# Altium PCB car_pcb.PcbDoc
Units mm, origin at the board's own origin, x right, y up, seen from the top; angles counter-clockwise.
Board outline 64 x 85 mm, 4 copper layers (Top Side, Ground Plane, Power Plane, Bottom Side), stack 0.844 mm thick; 112 components, 79 nets, 337 pads, 3 vias.
Unrouted connection lines stored in the file: 239.
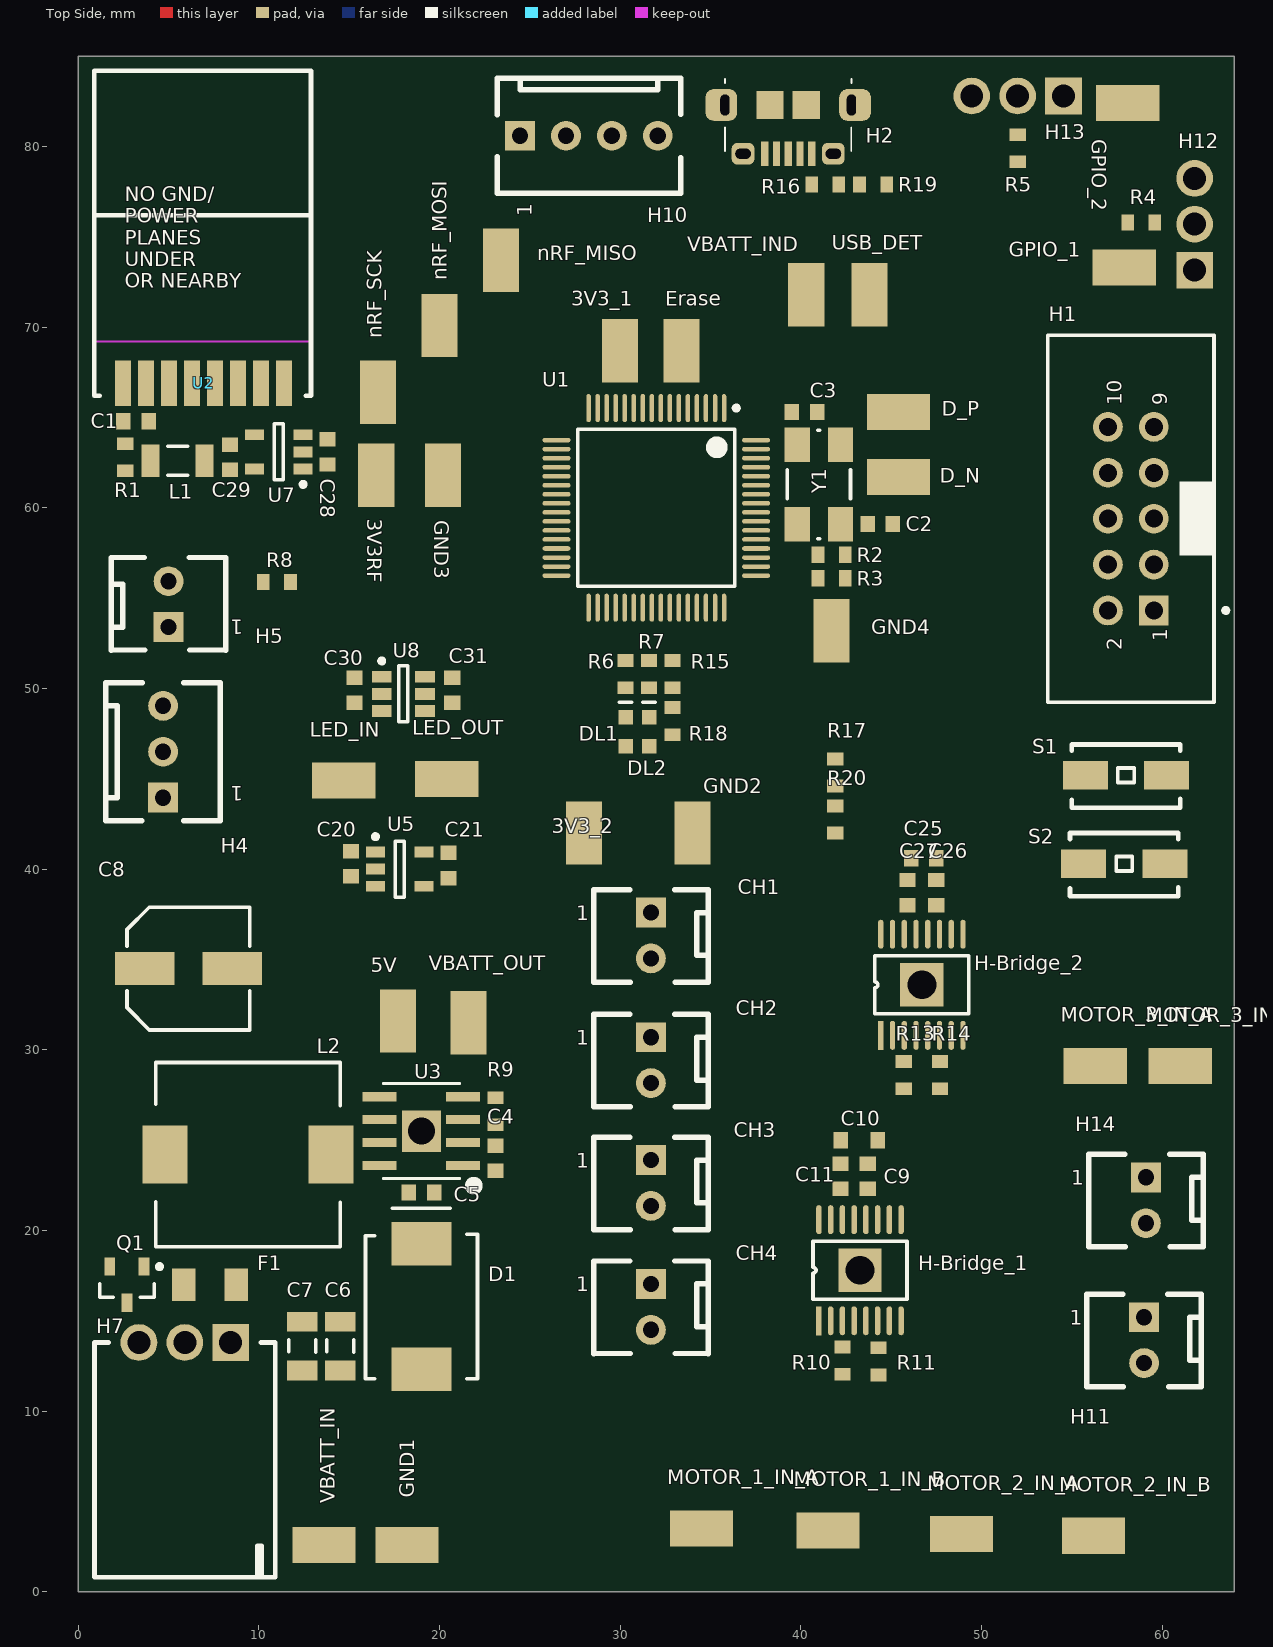
[diagram p0: Top Side view]
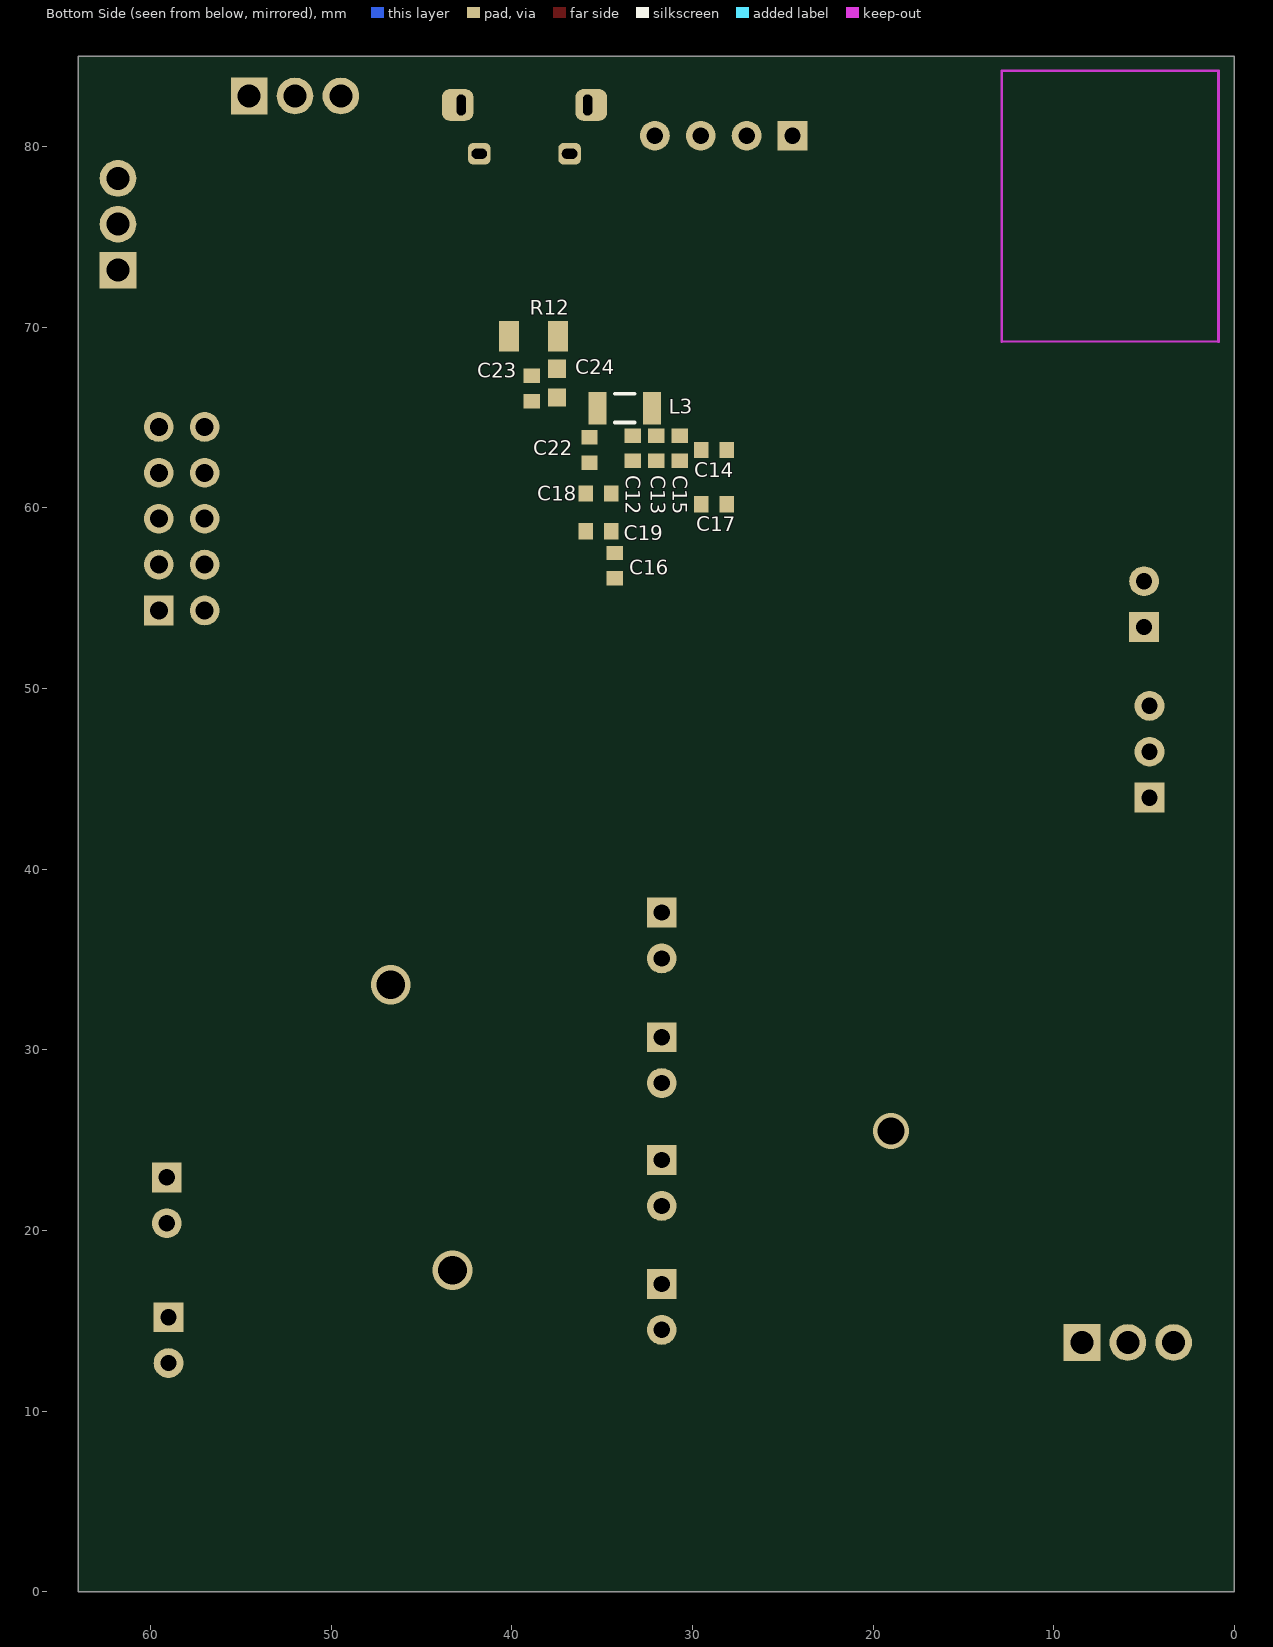
[diagram p1: Bottom Side view, seen from below]
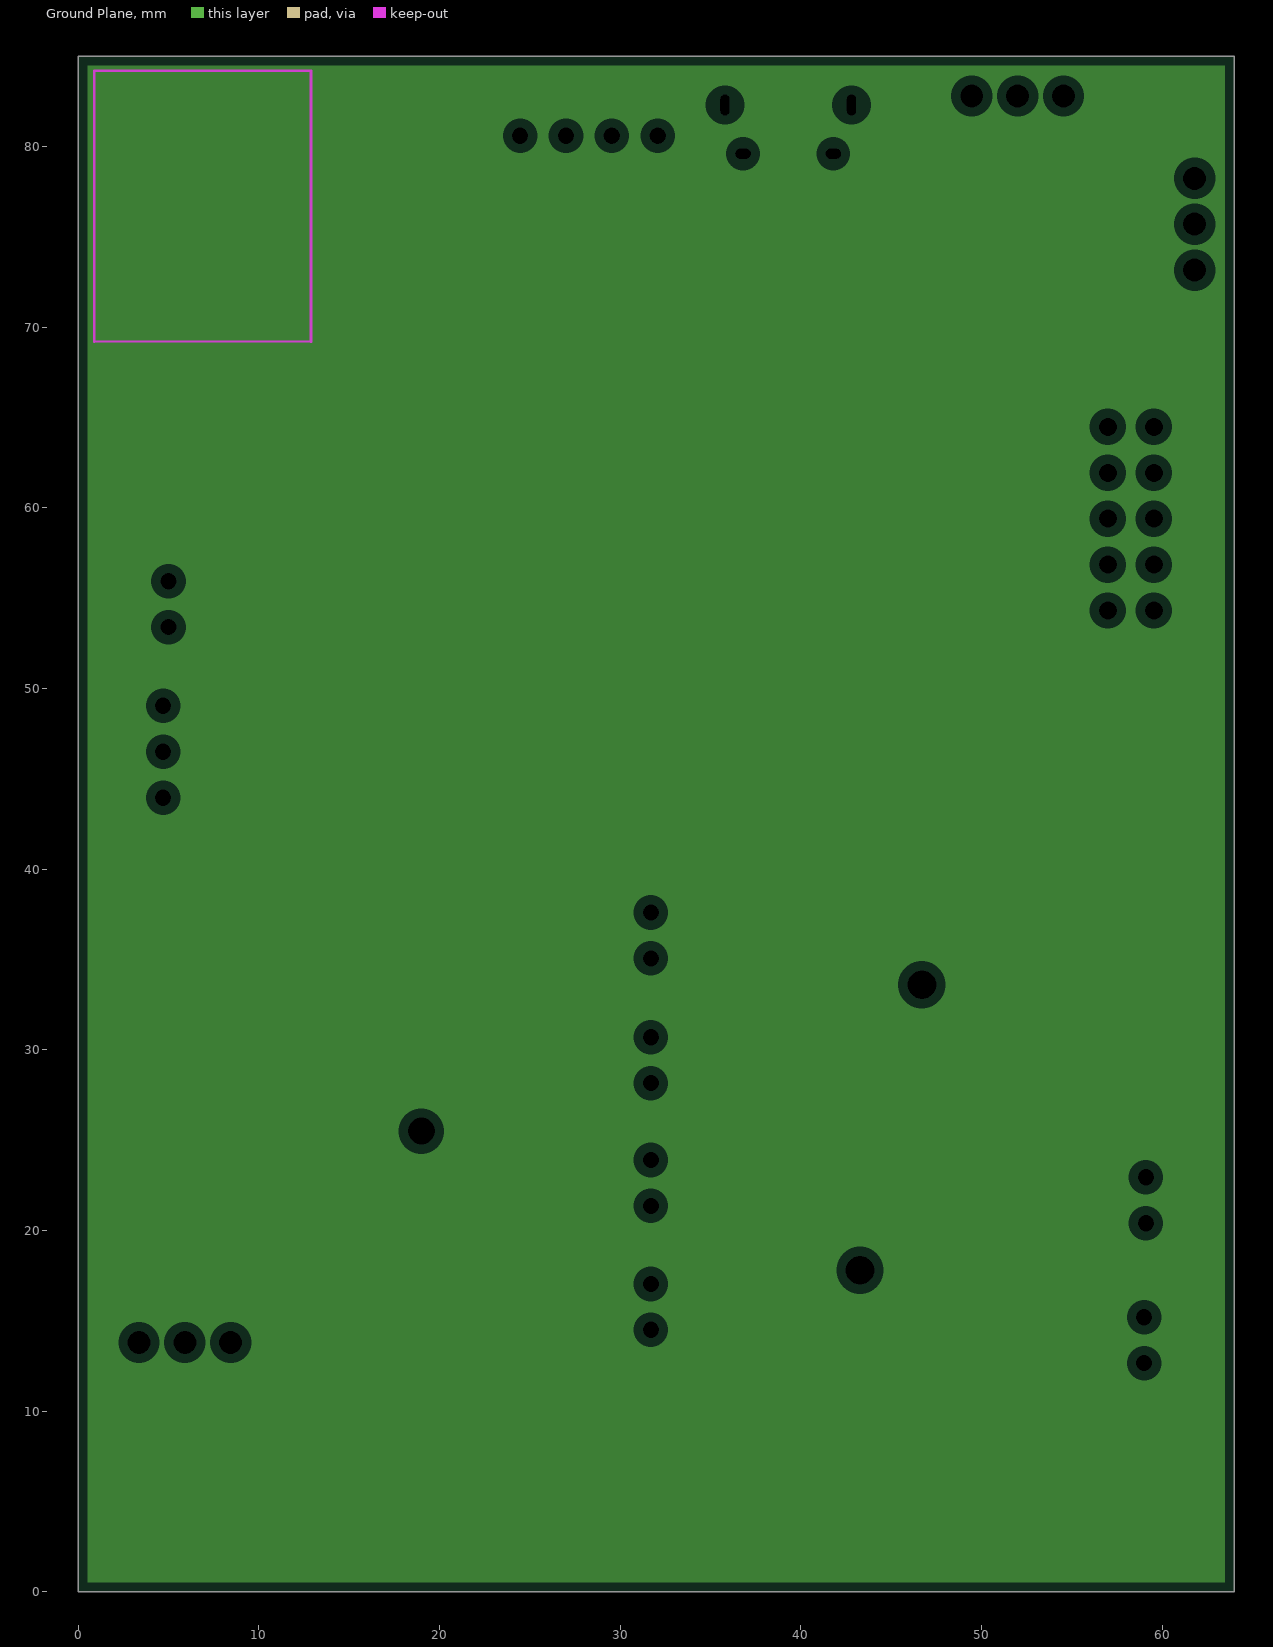
[diagram p2: Ground Plane, clearances drawn from the general rule]
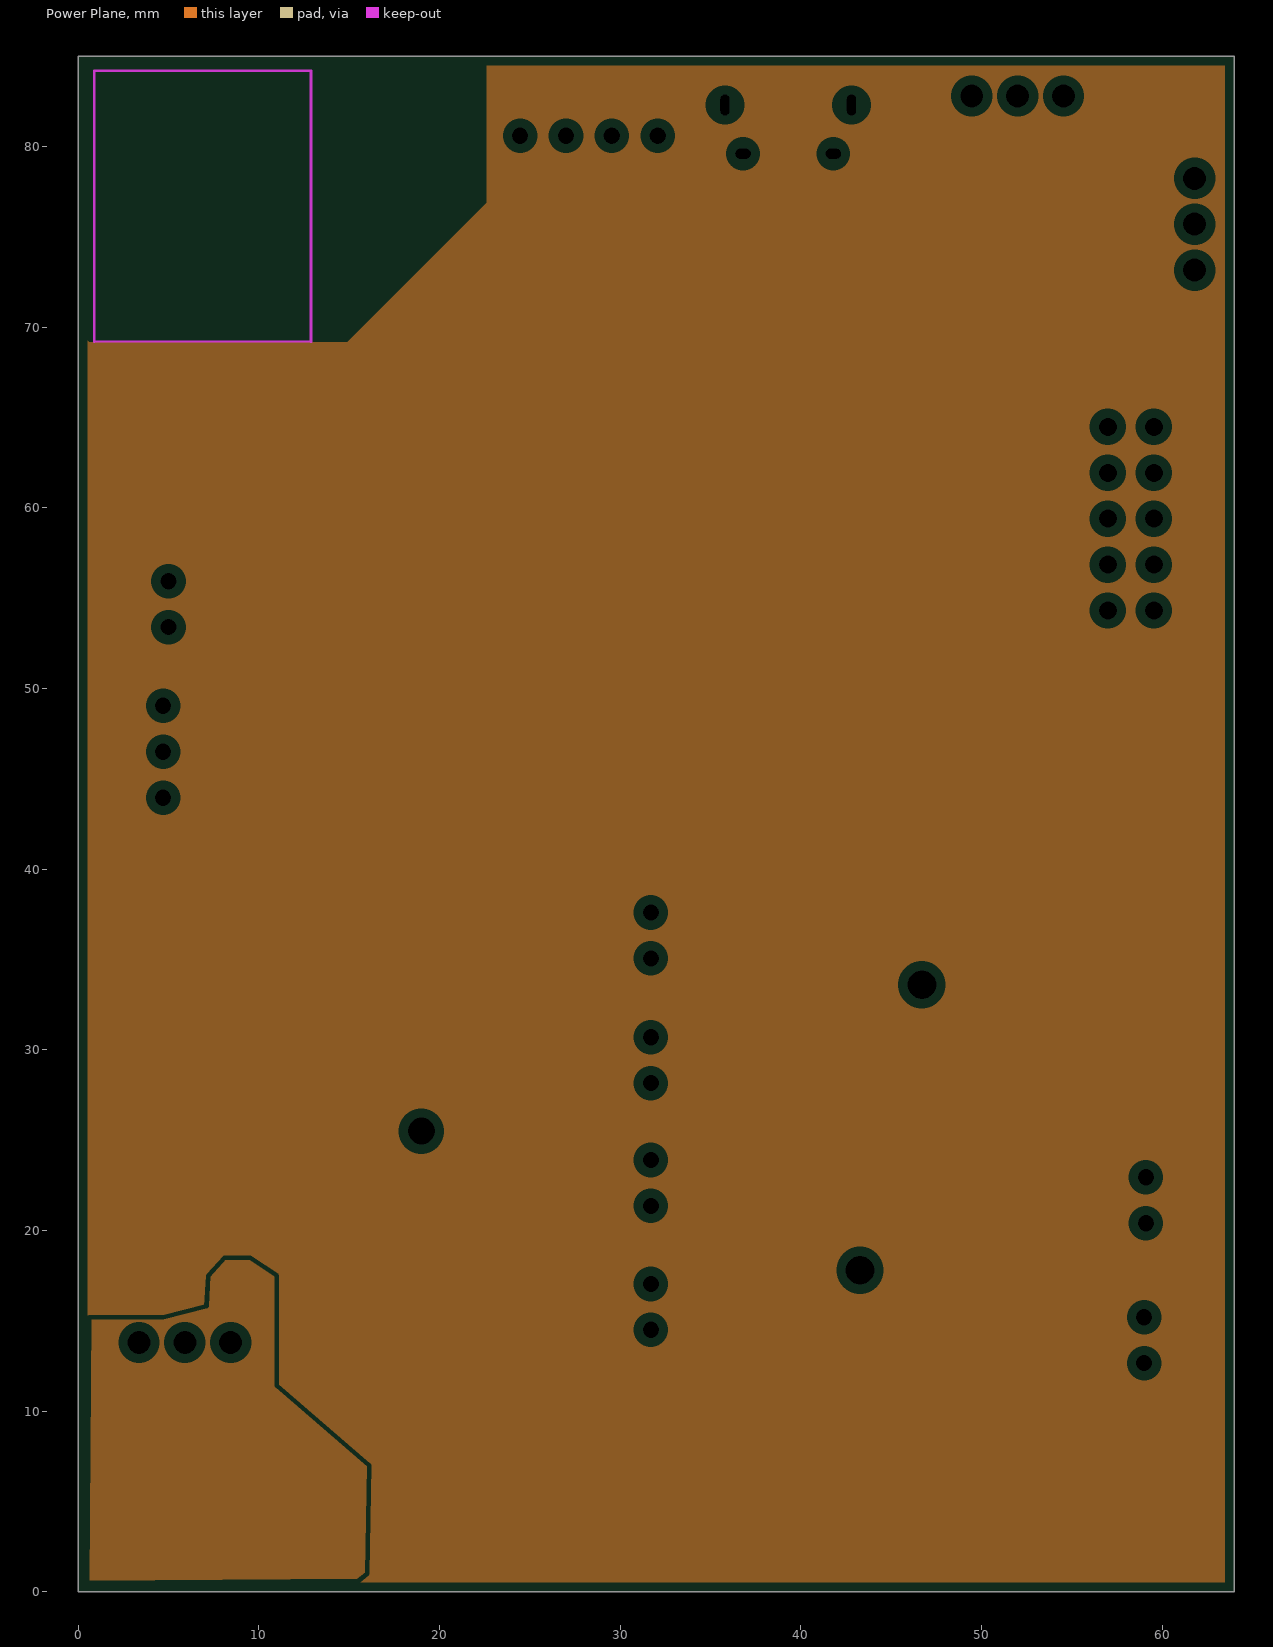
[diagram p3: Power Plane, clearances drawn from the general rule]

## Layer stack, top to bottom
Top Solder: solder mask 0.0102, Solder Resist, Dk 3.5
Top Side: signal copper 0.0356
Dielectric 1: core 0.32, FR-4, Dk 4.8
Ground Plane: plane copper 0.036
Dielectric 3: prepreg 0.127, Dk 4.2
Power Plane: plane copper 0.036
Dielectric 4: core 0.254, Dk 4.2
Bottom Side: signal copper 0.0356
Bottom Solder: solder mask 0.0102, Solder Resist, Dk 3.5

## Board outline
0,85 64,85 64,0 0,0 0,85

## Design rules (kind name [scope] priority, off if disabled: settings)
BoardOutlineClearance [All] p1: gap=0.5 ignorepadtopadclearanceinfootprint=FALSE
Clearance Min_Clearance_Circuit_Labs [All] p1: gap=0.15 ignorepadtopadclearanceinfootprint=FALSE except(0: Arc-Hole Track-Hole SMDPad-Hole THPad-Hole Via-Hole Fill-Hole Poly-Hole Region-Hole Text-Hole)
DiffPairsRouting [All] p1: maxlimit=0.254 minlimit=0.254 mostfreqgap=0.254 toplayer_minwidth=0.381 toplayer_maxwidth=0.381 toplayer_prefwidth=0.381 bottomlayer_minwidth=0.381 bottomlayer_maxwidth=0.381 bottomlayer_prefwidth=0.381 maxuncoupledlength=12.7
FanoutControl Fanout_BGA [IsBGA] p1 off: bgadir=Out bgaviamode=Centered fanoutstyle=Auto fanoutdirection=Alternating viagrid=0.025 // Fanout_BGA (Default Rule)
HoleSize [All] p1: absolutevalues=TRUE maxlimit=10 minlimit=0.3 maxpercent=80.000 minpercent=20.000
MinimumAnnularRing [All] p1: minimumring=0.1
MinimumSolderMaskSliver [All] p1: minsoldermaskwidth=0.1
NetAntennae [All] p1: netantennaetolerance=1
PasteMaskExpansion [All] p1 off: expansion=0.2
PlaneClearance [All] p1: clearance=0.508
PlaneConnect [All] p1: planeconnectstyle=Relief reliefexpansion=0.508 reliefentries=4 reliefconductorwidth=0.254 reliefairgap=0.254
PolygonConnect [All] p1: connectstyle=Relief reliefconductorwidth=0.254 reliefentries=4 polygonreliefangle="90 Angle" airgapwidth=0.254
RoutingVias [All] p1: holewidth=0.5 width=1 viastyle="Through Hole" minholewidth=0.3 minwidth=0.6 maxholewidth=1 maxwidth=2
SMDNeckDown [All] p1 off: percent=50.000
SMDToCorner [All] p1: distance=98425
SMDToPlane [All] p1: distance=1968504
SilkToSolderMaskClearance SilkscreenOverComponentPads [IsPad] p1: minsilkscreentomaskgap=0.254 clearancetoexposedcopper=TRUE
SolderMaskExpansion [All] p1: expansion=0.102
ViasUnderSMD [All] p1: allowed=FALSE
Width [All] p1: maxlimit=2 minlimit=0.15 preferedwidth=0.3
21 further rules are at their usual default settings.

## Classes and differential pairs
component class TestPoints: 3V3_2 3V3RF 5V D_N D_P GND1 GND2 GND3 GND4 GPIO_1 GPIO_2 LED_IN LED_OUT MOTOR_1_IN_A MOTOR_1_IN_B MOTOR_2_IN_A MOTOR_2_IN_B MOTOR_3_IN_A MOTOR_3_IN_B nRF_MISO nRF_MOSI nRF_SCK USB_DET VBATT_IN VBATT_IND VBATT_OUT
component class Power: "  " "         " C4 C5 C6 C7 C8 C9 C10 C11 C12 C13 C14 C15 C16 C17 C18 C19 C20 C21 C22 C23 C24 C25 C26 C27 C29 C30 C31 D1 F1 H-Bridge_1 H-Bridge_2 L2 L3 Q1 R9 R10 R11 R12 R13 R14 R15 R16 R17 R18 R19 R20 U3 U5 U7 U8
component class MCU: 3V3_1 C1 C2 C3 DL1 DL2 Erase H1 H2 L1 R1 R2 R3 R4 R5 R6 R7 S1 S2 U1 U2 Y1
component class Headers: Bumper CH1 CH2 CH3 CH4 H7 H12 H13 LED_TAPE M_1 M_2 R8 US
differential pair D: +D_P -D_N

## Components (designator, comment, footprint, x,y, rotation, side; value= is the part's Value field where it differs from the comment)
3V3_1 "TP" TP_1206 30,68.7 r90 top
3V3_2 "TP" TP_1206 28,42 r270 top
3V3RF "TP" TP_1206 16.5,61.8 r270 top
5V "TP" TP_1206 17.7,31.6 r270 top
C1 "10uF" CAPC1608L#1 3.2,64.8 r180 top
C2 "27nF" CAPC1608L#1 44.4,59.1 r180 top
C3 "27nF" CAPC1608L#1 40.2,65.3 r180 top
C4 "10uF" CAPC1608L#1 23.1,24 r90 top
C5 "100nF" CAPC1608L#1 19,22.1 r180 top
C6 "22uF" CAPC3216L 14.5,13.6 r90 top
C7 "22uF" CAPC3216L 12.4,13.6 r90 top
C8 "100µF/25V" CAPAE6666X77M 6.1,34.5 r0 top
C9 "10nF" CAPC1608L#1 43.7,23 r270 top
C10 "10uF" CAPC1608L#2 42.9,25 r0 top
C11 "2.2uF" CAPC1608L#1 42.2,23 r90 top
C12 "100nF" CAPC1608L#1 33.3,63.3 r90 bottom
C13 "100nF" CAPC1608L#1 32,63.3 r270 bottom
C14 "100nF" CAPC1608L#1 28.8,63.2 r180 bottom
C15 "100nF" CAPC1608L#1 30.7,63.3 r270 bottom
C16 "100nF" CAPC1608L#1 34.3,56.8 r270 bottom
C17 "100nF" CAPC1608L#1 28.8,60.2 r0 bottom
C18 "100nF" CAPC1608L#1 35.2,60.8 r0 bottom
C19 "100nF" CAPC1608L#1 35.2,58.7 r180 bottom
C20 "1uF" CAPC1608L#1 15.1,40.3 r270 top
C21 "1uF" CAPC1608L#1 20.5,40.2 r90 top
C22 "100nF" CAPC1608L#1 35.7,63.2 r90 bottom
C23 "4.7uF" CAPC1608N 37.5,66.9 r270 bottom
C24 "100nF" CAPC1608L#1 38.9,66.6 r270 bottom
C25 "10uF" CAPC1608L#1 46.8,40.6 r0 top
C26 "100nF" CAPC1608L#1 47.5,38.7 r90 top
C27 "2.2uF" CAPC1608L#1 45.9,38.7 r90 top
C28 "1uF" CAPC1608L#1 13.8,63.1 r90 top
C29 "1uF" CAPC1608L#1 8.4,62.8 r270 top
C30 "100nF" CAPC1608L#1 15.3,49.9 r90 top
C31 "100nF" CAPC1608L#1 20.7,49.9 r90 top
CH1 "2 Pin Molex KK HDR" MOLEX_KK_2_HDR 31.7,37.6 r270 top
CH2 "2 Pin Molex KK HDR" MOLEX_KK_2_HDR 31.7,30.7 r270 top
CH3 "2 Pin Molex KK HDR" MOLEX_KK_2_HDR 31.7,23.9 r270 top
CH4 "2 Pin Molex KK HDR" MOLEX_KK_2_HDR 31.7,17.04 r270 top
D1 "SCHOTTKY 30V 4A" SMC 19,15.8 r90 top
D_N "TP" TP_1206 45.4,61.7 r180 top
D_P "TP" TP_1206 45.4,65.3 r180 top
DL1 "Dark Green" WL-SMCW0603 30.3,48.4 r270 top
DL2 "Red" WL-SMCW0603 31.6,48.4 r270 top
Erase "TP" TP_1206 33.4,68.7 r270 top
F1 "5A" RESC3216N 7.3,17 r180 top
GND1 "TP" TP_1206 18.2,2.6 r180 top
GND2 "TP" TP_1206 34,42 r270 top
GND3 "TP" TP_1206 20.2,61.8 r270 top
GND4 "TP" TP_1206 41.7,53.2 r270 top
GPIO_1 "TP" TP_1206 57.9,73.3 r0 top
GPIO_2 "TP" TP_1206 58.1,82.4 r0 top
H1 "Header 5X2 Vert" IDC2.54-V10D 58.27,59.4 r90 top
H2 "JS_USB_MICRO_B" FCI_USB_10118194-0001LF 39.3,83.75 r180 top
H4 "3 Pin Molex KK Hdr" MOLEX_KK_3_HDR 4.7,43.96 r90 top
H5 "2 Pin Molex KK HDR" MOLEX_KK_2_HDR 5,53.4 r90 top
H7 "Battery_HEADER_3pin" BATT_HEADER_3POS 5.9,13.8 r180 top
H10 "Ultrasonic Sensor Connector" MOLEX_KK_4_HDR 24.46,80.6 r0 top
H11 "2 Pin Molex KK HDR" MOLEX_KK_2_HDR 59,15.2 r270 top
H12 "HEADER_3" HEADER_3POS 61.8,75.7 r90 top
H13 "HEADER_3" HEADER_3POS 52,82.8 r180 top
H14 "2 Pin Molex KK HDR" MOLEX_KK_2_HDR 59.1,22.94 r270 top
H-Bridge_1 "DRV8833" HTSOP16#1 41,15 r90 top locked (schematic designator U4)
H-Bridge_2 "DRV8833" HTSOP16#2 44.425,30.8 r90 top (schematic designator U6)
L1 "1A max, Idc 0.3R," INDC3216L 5.5,62.6 r0 top
L2 "IND 5.2UH 6A" INDUCTOR5u2 9.4,24.2 r180 top
L3 "1A max, Idc 0.3R," INDC3216L 33.75,65.525 r180 bottom
LED_IN "TP" TP_1206 14.7,44.9 r180 top
LED_OUT "TP" TP_1206 20.4,45 r180 top
MOTOR_1_IN_A "TP" TP_1206 34.5,3.5 r180 top
MOTOR_1_IN_B "TP" TP_1206 41.5,3.4 r180 top
MOTOR_2_IN_A "TP" TP_1206 48.9,3.2 r180 top
MOTOR_2_IN_B "TP" TP_1206 56.2,3.1 r180 top
MOTOR_3_IN_A "TP" TP_1206 56.3,29.1 r180 top
MOTOR_3_IN_B "TP" TP_1206 61,29.1 r180 top
nRF_MISO "TP" TP_1206 23.4,73.7 r270 top
nRF_MOSI "TP" TP_1206 20,70.1 r270 top
nRF_SCK "TP" TP_1206 16.6,66.4 r270 top
Q1 "SSM3J328R,LF" SOT23_L 2.7,17 r270 top
R1 "10R" RESC1608L 2.6,62.8 r270 top
R2 "27R" RESC1608L 41.7,57.4 r180 top
R3 "27R" RESC1608L 41.7,56.1 r180 top
R4 "100R" RESC1608L 58.85,75.8 r0 top
R5 "100R" RESC1608L 52,79.9 r90 top
R6 "100R" RESC1608L 30.3,50.8 r90 top
R7 "1K3" RESC1608L 31.6,50.8 r90 top
R8 "100K" RESC1608L 11,55.9 r180 top
R9 "100K" RESC1608L 23.1,26.6 r270 top
R10 "0R" RESC1608L 42.3,12.8 r270 top
R11 "0R" RESC1608L 44.3,12.75 r90 top
R12 "1R" RESC3216L 38.8,69.5 r0 bottom
R13 "0R" RESC1608L 45.7,28.6 r270 top
R14 "0R" RESC1608L 47.7,28.6 r270 top
R15 "470K" RESC1608L 32.9,50.8 r90 top
R16 "270K" RESC1608L 41.35,77.9 r180 top
R17 "10K" RESC1608L 41.9,45.35 r90 top
R18 "270K" RESC1608L 32.9,48.2 r90 top
R19 "470K" RESC1608L 44,77.9 r180 top
R20 "10K" RESC1608L 41.9,42.75 r90 top
S1 "EVQPNF05M" EVQPNF05M 58,45.2 r180 top
S2 "EVQPNF05M" EVQPNF05M 57.9,40.3 r180 top
U1 "ATSAM4S8BA-ANR" LQFP64_L 32,60 r270 top locked
U2 "nRF24 SMD" NRF24 0.886,66.2 r0 top
U3 "ADP2302ARDZ-5.0 BUCK" RD_8_1 19,25.5 r180 top locked value=Value
U5 "CAT6219-330TDGT3" SOT95P280X145-5N 17.8,40 r0 top
U7 "CAT6219-330TDGT3" SOT95P280X145-5N 11.1,63.1 r180 top
U8 "SN74LVC1T45" SOT23-6_N 18,49.7 r0 top
USB_DET "TP" TP_1206 43.8,71.8 r90 top
VBATT_IN "TP" TP_1206 13.6,2.6 r180 top
VBATT_IND "TP" TP_1206 40.3,71.8 r270 top
VBATT_OUT "TP" TP_1206 21.6,31.5 r90 top
Y1 "12MHz" 6.0X3.5-4 41,61.3 r270 top

## Footprints (in the part's own frame and the unit in brackets; to place one, negate y for a bottom-side part, rotate by r counter-clockwise, add the part's x,y. Pads: shape width x height; smd on the part's side, far side on the other; paste and mask are expansions set on the pad)
6.0X3.5-4 [mm] "4 SMD 6.0X3.5 mm No Lead Crystal"
  rect 1.9x1.4 smd: 1(-2.2,-1.2) 2(2.2,-1.2) 3(2.2,1.2) 4(-2.2,1.2)
  silkscreen extent -3,-1.75 3,1.75, body extent -3,-1.75 3,1.75, height 1.2
BATT_HEADER_3POS [mil]
  rect 80x80 hole 50: 1(-100,0)
  round 80 hole 50: 2(0,0) 3(100,0)
  silkscreen extent -197,0 197,512
CAPAE6666X77M [mm] "Aluminum Electrolytic Capacitor, Body 6.60x6.60x7.70mm, IPC Low Density"
  rect 3.3x1.85 smd: 1(2.425,0) 2(-2.425,0)
  silkscreen extent -3.4,-3.4 3.4,3.4, body extent -3.4,-3.4 3.4,3.4, height 7.7
CAPC1608L#1 [mm] "Chip Capacitor, Body 1.6x0.8mm, IPC High Density"
  rect 0.8x0.9 smd: 1(-0.7,0) 2(0.7,0)
  body extent -0.87,-0.48 0.87,0.48, height 0.85
CAPC1608L#2 [mm] "Chip Capacitor, Body 1.6x0.8mm, IPC High Density"
  rect 0.8x0.9 smd: 1(-0.7,0) 2(1.35,0)
  body extent -0.87,-0.48 0.87,0.48, height 0.85
CAPC1608N [mm] "Chip Capacitor, Body 1.6x0.8mm, IPC Medium Density"
  rect 1x1 smd: 1(-0.8,0) 2(0.8,0)
  body extent -0.87,-0.48 0.87,0.48, height 0.85
CAPC3216L [mm] "Chip Capacitor, Body 3.2x1.6mm, IPC High Density"
  rect 1.1x1.7 smd: 1(-1.35,0) 2(1.35,0)
  silkscreen extent -0.35,-0.75 0.35,0.75, body extent -1.7,-0.9 1.7,0.9, height 1.35
EVQPNF05M [mm] "Panansonic light touch SMD push button switch"
  rect 2.5x1.6 smd: 1(-2.25,0) 2(2.25,0)
  silkscreen extent -3,-1.7 3,1.8, body extent -3,-1.7 3,1.8, height 5
FCI_USB_10118194-0001LF [mm] "Micro USB B Type Receptacle"
  rect 0.4x1.35 smd mask+0.07: 1(-1.3,4.15) 2(-0.65,4.15) 3(0,4.15) 4(0.65,4.15) 5(1.3,4.15)
  rrect50% 1.75x1.75 hole 0.5 slot 1.15 at 90 deg copper offset -0.2,0 paste+0 mask+0.1: 6(-3.5,1.45)
  rrect50% 1.25x1.2 hole 0.55 slot 0.85 at 0 deg: 6(-2.5,4.15) 6(2.5,4.15)
  rect 1.5x1.55 smd: 6(-1,1.45) 6(1,1.45)
  rrect50% 1.75x1.75 hole 0.5 slot 1.15 at 90 deg copper offset 0.2,0 paste+0 mask+0.1: 6(3.5,1.45)
  silkscreen extent -3.5,0 3.5,4
HEADER_3POS [mil]
  rect 80x80 hole 50: 1(-100,0)
  round 80 hole 50: 2(0,0) 3(100,0)
HTSOP16#1 [mm]
  rect 1.6x0.3 smd: 1(0,0)
  oval 1.6x0.3 smd: 2(0,-0.65) 3(0,-1.3) 4(0,-1.95) 5(0,-2.6) 6(0,-3.25) 7(0,-3.9) 8(0,-4.55) 9(5.6,-4.55) 10(5.6,-3.9) 11(5.6,-3.25) 12(5.6,-2.6) 13(5.6,-1.95) 14(5.6,-1.3) 15(5.6,-0.65) 16(5.6,0)
  rect 2.4x2.4 smd paste-0.5: 17(2.8,-2.275)
  silkscreen extent 1.2,-4.88 4.4,0.33
HTSOP16#2 [mm]
  rect 1.6x0.3 smd: 1(0,0)
  oval 1.6x0.3 smd: 2(0,-0.65) 3(0,-1.3) 4(0,-1.95) 5(0,-2.6) 6(0,-3.25) 7(0,-3.9) 8(0,-4.55) 9(5.6,-4.55) 10(5.6,-3.9) 11(5.6,-3.25) 12(5.6,-2.6) 13(5.6,-1.95) 14(5.6,-1.3) 15(5.6,-0.65) 16(5.6,0)
  rect 2.4x2.4 smd: 17(2.8,-2.275)
  silkscreen extent 1.2,-4.88 4.4,0.33
IDC2.54-V10D [mm] "Connector; IDC, Low Profile Male Header, Thru-Hole; 10 Position; Vertical; Pitch 2.54 mm; Body 20.32 x 9.2 x 9.45 mm (LxWxH)"
  rect 1.65x1.65 hole 1: 1(-5.08,-1.27)
  round 1.65 hole 1: 2(-5.08,1.27) 3(-2.54,-1.27) 4(-2.54,1.27) 5(0,-1.27) 6(0,1.27) 7(2.54,-1.27) 8(2.54,1.27) 9(5.08,-1.27) 10(5.08,1.27)
  silkscreen extent -10.16,-5.38 10.16,4.6, body extent -10.16,-4.6 10.16,4.6, height 9.45
INDC3216L [mm] "Chip Inductor, Body 3.2x1.6mm, IPC High Density"
  rect 1x1.8 smd: 1(-1.5,0) 2(1.5,0)
  silkscreen extent -0.55,-0.8 0.55,0.8, body extent -1.75,-0.95 1.75,0.95, height 1.9
INDUCTOR5u2 [mm]
  rect 2.5x3.2 smd: 1(-4.6,0) 2(4.6,0)
  silkscreen extent -5.1,-5.1 5.1,5.1
LQFP64_L [mm] "Thin QFP, 64-Leads, Body 10x10mm, Pitch 0.5mm, IPC High Density"
  oval 1.55x0.25 smd mask+0.07: 1(-5.525,3.75) 2(-5.525,3.25) 3(-5.525,2.75) 4(-5.525,2.25) 5(-5.525,1.75) 6(-5.525,1.25) 7(-5.525,0.75) 8(-5.525,0.25) 9(-5.525,-0.25) 10(-5.525,-0.75) 11(-5.525,-1.25) 12(-5.525,-1.75) 13(-5.525,-2.25) 14(-5.525,-2.75) 15(-5.525,-3.25) 16(-5.525,-3.75) 33(5.525,-3.75) 34(5.525,-3.25) 35(5.525,-2.75) 36(5.525,-2.25) 37(5.525,-1.75) 38(5.525,-1.25) 39(5.525,-0.75) 40(5.525,-0.25) 41(5.525,0.25) 42(5.525,0.75) 43(5.525,1.25) 44(5.525,1.75) 45(5.525,2.25) 46(5.525,2.75) 47(5.525,3.25) 48(5.525,3.75)
  oval 0.25x1.55 smd mask+0.07: 17(-3.75,-5.525) 18(-3.25,-5.525) 19(-2.75,-5.525) 20(-2.25,-5.525) 21(-1.75,-5.525) 22(-1.25,-5.525) 23(-0.75,-5.525) 24(-0.25,-5.525) 25(0.25,-5.525) 26(0.75,-5.525) 27(1.25,-5.525) 28(1.75,-5.525) 29(2.25,-5.525) 30(2.75,-5.525) 31(3.25,-5.525) 32(3.75,-5.525) 49(3.75,5.525) 50(3.25,5.525) 51(2.75,5.525) 52(2.25,5.525) 53(1.75,5.525) 54(1.25,5.525) 55(0.75,5.525) 56(0.25,5.525) 57(-0.25,5.525) 58(-0.75,5.525) 59(-1.25,5.525) 60(-1.75,5.525) 61(-2.25,5.525) 62(-2.75,5.525) 63(-3.25,5.525) 64(-3.75,5.525)
  silkscreen extent -5.65,-4.35 4.35,4.55, body extent -5,-5 5,5, height 1.6
MOLEX_KK_2_HDR [mil] "MOLEX_KK_2_HDR"
  rect 65x65 hole 35.43: 1(0,0)
  round 65 hole 35.43: 2(100,0)
  silkscreen extent -50,-125 152,125, body extent -44,-121 146,119, height 630
MOLEX_KK_3_HDR [mil] "MOLEX_KK_3_HDR"
  rect 65x65 hole 35.43: 1(0,0)
  round 65 hole 35.43: 2(100,0) 3(200,0)
  silkscreen extent -50,-125 250,125, body extent -44,-120 244,119, height 630
MOLEX_KK_4_HDR [mil] "MOLEX_KK_4_HDR"
  rect 65x65 hole 35.43: 1(0,0)
  round 65 hole 35.43: 2(100,0) 3(200,0) 4(300,0)
  silkscreen extent -50,-125 350,125, body extent -44,-119 343,119, height 630
NRF24 [mm]
  rect 0.9x2.5 smd: 1(1.6,0.7) 2(2.871,0.7) 3(4.143,0.7) 4(5.414,0.7) 5(6.686,0.7) 6(7.957,0.7) 7(9.229,0.7) 8(10.5,0.7)
  Keep-Out Layer lines w0.1: 0,3 12,3
  Keep-Out Layer lines w0.15: 0,3 0,18 12,18 12,3
  silkscreen extent 0,0 12,18
RD_8_1 [mil]
  rect 74x20 smd paste+0 mask+0: 1(-91,75) 2(-91,25) 3(-91,-25) 4(-91,-75) 5(91,-75) 6(91,-25) 7(91,25) 8(91,75)
  rect 84.65x90 smd paste-44.5 mask+0: EPAD(0,0)
  silkscreen extent -118,-104 84,123, body extent 0,0 10,10, height 10
RESC1608L [mm] "Chip Resistor, Body 1.6x0.8mm, IPC High Density"
  rect 0.7x0.9 smd: 1(-0.75,0) 2(0.75,0)
  body extent -0.85,-0.48 0.85,0.48, height 0.9
RESC3216L [mm] "Chip Resistor, Body 3.1x1.6mm, IPC High Density"
  rect 1.1x1.7 smd: 1(-1.35,0) 2(1.35,0)
  body extent -1.68,-0.87 1.68,0.87, height 2.54
RESC3216N [mm] "Chip Resistor, Body 3.2x1.6mm, IPC Medium Density"
  rect 1.3x1.8 smd: 1(-1.45,0) 2(1.45,0)
  body extent -1.68,-0.87 1.68,0.87, height 0.71
SMC [mm] "DO-214-AB/SMC; 2 C-Bend Leads; Body 7.9 x 5.9 mm, inc. leads (LxW)"
  rect 2.4x3.3 smd: 1(-3.475,0) 2(3.475,0)
  silkscreen extent -4,-3.1 5.43,3.1
SOT23-6_N [mm]
  rect 1.1x0.65 smd: 1(-1.2,0.95) 2(-1.2,0) 3(-1.2,-0.95) 4(1.2,-0.95) 5(1.2,0) 6(1.2,0.95)
  silkscreen extent -1.32,-1.55 0.25,1.95, body extent -0.9,-1.55 0.9,1.55, height 1.45
SOT23_L [mm] "SOT23, 3-Leads, Body 2.9x1.3mm, Pitch 0.95mm, Lead Span 2.3mm, IPC High Density"
  rect 1x0.6 smd: 1(-1,0.95) 2(-1,-0.95) 3(1,0)
  silkscreen extent -1.12,-1.5 0.7,1.93, body extent -0.7,-1.5 0.7,1.5, height 1.1
SOT95P280X145-5N [mm] "SOT23, 5-Leads, Body 2.90x2.80mm, Pitch 0.95mm, IPC Medium Density"
  rect 1.05x0.6 smd: 1(-1.35,0.95) 2(-1.35,0) 3(-1.35,-0.95) 4(1.35,-0.95) 5(1.35,0.95)
  silkscreen extent -1.47,-1.55 0.25,1.92, body extent -0.87,-1.52 0.87,1.53, height 1.45
TP_1206 [mm] "Test Point Pad"
  rect 3.5x2 smd: 1(0,0)
  body extent -1.62,-0.85 1.63,0.8, height 2
WL-SMCW0603 [mm] "2.4 x 0.8 x 0.7mm LED"
  rect 0.8x0.8 smd: 1(0,0) 2(1.6,0)
  silkscreen extent -0.85,-0.35 -0.85,0.35

## Part data
3V3_1 3V3_2 3V3RF 5V D_N D_P Erase GND1 GND2 GND3 GND4 GPIO_1 GPIO_2 LED_IN LED_OUT MOTOR_1_IN_A MOTOR_1_IN_B MOTOR_2_IN_A MOTOR_2_IN_B MOTOR_3_IN_A MOTOR_3_IN_B nRF_MISO nRF_MOSI nRF_SCK USB_DET VBATT_IN VBATT_IND VBATT_OUT: library part TP_1206, "Test-Point 3.3x1.6x2.1mm SMD", Manufacturer="Harwin Inc", Manufacturer Part Number=S1751-46R, Supplier Part Number 1=952-1478-2-ND, Mounting Type="Surface Mount", Storage Location=ProtoPlace, Supplier="ECE Dept", Supplier 1=Digi-Key, Supplier 2=Farnell, Supplier Part Number 2=1826282, Type="PC Test Point"
C1 C4 C10 C25: library part CC_10uF_0603, "CAP CER 10UF X5R +-20% 6V3 0603", Voltage - Rated=6.3V, Storage Location="PCB Assembly WS", Supplier="ECE Dept"
C2 C3: library part CC_27nF_0603, "CAP CER 27nF X7R +-10% 50V 0603", Code_IPC="1608 [0603]", PackageReference=0603, Storage Location="PCB Assembly WS", Supplier="ECE Dept"
C5 C12 C13 C14 C15 C16 C17 C18 C19 C22 C24 C26 C30 C31: library part CC_100nF_0603, "CAP CER 100nF X7R +-10% 50V 0603", Code_IPC="1608 [0603]", PackageReference=0603, Storage Location="PCB Assembly WS", Supplier="ECE Dept"
C6 C7: library part CC_22uF_1206, "CAP CER 22uF Y5V -20% +80% 10V 1206", Dielectric=Y5V, Max Voltage=10V, Storage Location="PCB Assembly WS", Supplier="ECE Dept"
C8: library part CA_100uF_25V, "CAP ALUM 100UF 25V 20% SMD", Manufacturer=Nichicon, Manufacturer Part Number=UWT1E101MCL1GS, Operating Temperature="-55°C ~ 105°C", Package / Case="Radial, Can - SMD", Ripple Current=91mA, Supplier Part Number 1=493-2190-1-ND, Capacitance=100µF/25V, Height - Seated (Max)="0.303\" (7.70mm)", Mounting Type="Surface Mount", Size / Dimension="0.248\" Dia (6.30mm)", Supplier 1=Digi-Key
C9: library part CC_10nF_0603, "CAP CER 10nF X7R +-10% 50V 0603", Code_IPC="1608 [0603]", PackageReference=0603, Storage Location="PCB Assembly WS", Supplier="ECE Dept"
C11 C27: library part CC_2.2uF_0603, "CAP CER 2.2uF X5R +-20% 10V 0603", Max Voltage=10V, Code_IPC="1608 [0603]", PackageReference=0603, Storage Location="PCB Assembly WS", Supplier="ECE Dept"
C20 C21 C28 C29: library part CC_1uF_0603, "CAP CER 1uF Y5V -20% +80% 16V 0603", Max Voltage=16V, Code_IPC="1608 [0603]", PackageReference=0603, Storage Location="PCB Assembly WS", Supplier="ECE Dept"
C23: library part CC_4.7uF_0603, "CAP CER 4.7uF X5R +-20%  10V 0603", Max Voltage=10V, Code_IPC=2012[0805], Note="Footprint corresponds to dimensions for bulk cassette packaging. This case size has tightened tolerances.", PackageReference=0805, Storage Location="PCB Assembly WS", Supplier="ECE Dept"
CH1 CH2 CH3 CH4 H5 H11 H14: library part JA_MOLEX_KK_2POS, "CONN HEADER 2POS 2.54mm VERT_Thru Hole", Supplier Part Number 1=1462926, Storage Location="ECE Dept Store", Supplier="ECE Dept", Supplier 1=Farnell
D1: library part MBRS330T3G, "DIODE SCHOTTKY 30V 4A SMC", Base Part Number=MBRS330, Capacitance @ Vr, F=-, Current - Average Rectified (Io)=4A, Manufacturer="ON Semiconductor", Operating Temperature - Junction="-65°C ~ 150°C", Package / Case="DO-214AB, SMC", Supplier Device Package=SMC, Supplier Part Number 1=MBRS330T3GOSCT-ND, Category="Discrete Semiconductor Products", ComponentLink1Description=http://www.onsemi.com/pub/Collateral/MBRS340T3-D.PDF, ComponentLink1URL=http://www.onsemi.com/pub/Collateral/MBRS340T3-D.PDF, Diode Type=Schottky, Manufacturer Part Number=MBRS330T3G, Mounting Type="Surface Mount", Packaging="Cut Tape (CT)", Part Status=Active, Pricing 1="1=0.93, 10=0.79, 100=0.5902, 500=0.46368, 1000=0.35829 (NZD)", RoHS="RoHS Compliant", Speed="Fast Recovery =< 500ns, > 200mA (Io)", Stock 1=8919, Supplier 1=Digi-Key
DL1: library part DL_150060GS75000, "LED Dk Green 430mcd 0603 SMD", Forward Current If=30, Forward Voltage=3.2, Manufacturer="WURTH ELEKTRONIK", Manufacturer Part Number=150060GS75000, Supplier Part Number 1=2322070, LED Colour="Dark Green", LED Mounting=SMD, Lens Shape=Rectangular, Luminous Intensity=430, Storage Location="PCB Assembly WS", Supplier="ECE Dept", Supplier 1=Farnell, Viewing Angle=140°, Wavelength Typ=520
DL2: library part DL_150060RS75000, "LED Red 250mcd 0603 SMD", Forward Current If=30, Forward Voltage=2, Manufacturer="WURTH ELEKTRONIK", Manufacturer Part Number=150060RS75000, Supplier Part Number 1=2322071, LED Colour=Red, LED Mounting=SMD, Lens Shape=Rectangular, Luminous Intensity=250, Storage Location="PCB Assembly WS", Supplier="ECE Dept", Supplier 1=Farnell, Viewing Angle=140°, Wavelength Typ=625
F1: library part FS_Fuse_5.0A, "Fuse 5.0A Fast Acting 1206 SMD", Case/Package=1206, Case Code (Metric)=3216, DC Cold Resistance=19mR, Manufacturer="Bel TRP", Manufacturer Part Number=C1F5, Max Operating Temperature=125°C, Min Operating Temperature=-55°C, Supplier Part Number 1=507-1886-1-ND, Voltage Rating=125V, Voltage Rating (DC)=63V, Approvals=CE,cURus, Case Code (Imperial)=1206, ComponentLink1Description=http://www.farnell.com/datasheets/2571625.pdf, ComponentLink1URL=http://www.farnell.com/datasheets/2571625.pdf, ComponentLink2Description=http://belfuse.com/pdfs/C1F.pdf, ComponentLink2URL=http://belfuse.com/pdfs/C1F.pdf, ComponentLink3Description=http://www.mouser.com/ds/2/643/C1F-594910.pdf, ComponentLink3URL=http://www.mouser.com/ds/2/643/C1F-594910.pdf, ComponentLink4Description=https://belfuse.com/resources/StewartConnector/C1F.pdf, ComponentLink4URL=https://belfuse.com/resources/StewartConnector/C1F.pdf, Contact Plating=Nickel,Tin, Current Rating=5A, Fuse Type="Board Mount (Cartridge Style Excluded)", Length=0.126inch, Mount="Surface Mount", Number of Pins=2, Packaging="Tape and Reel", Pricing 1="1=0.32, 5=0.312, 10=0.298, 50=0.2662, 100=0.2479, 250=0.22032, 500=0.1836, 1000=0.17442 (USD)", Stock 1=725, Supplier 1=Digi-Key, Supplier 2=Element14, Supplier Part Number 2=2848595, Voltage Rating (AC)=125V, Width=0.062inch
H1: library part JA_HDR_IDC_5X2_VERT, "IDC Header, 2,54mm, 10-Pin, Vert", Supplier Part Number 1=1096985, Storage Location="ECE Dept Store", Supplier="ECE Dept", Supplier 1=Farnell
H2: library part JS_USB_MICRO_B_SMT, "CONN USB MICRO B RECPT SMT R/A", Manufacturer=FCI, Manufacturer Part Number=10118194-0001LF, Supplier Part Number 1=609-4618-1-ND, Features="Shielded, Solder Retention", Gender=Receptacle, Mounting Type="Surface Mount, Right Angle, Horizontal", Number of Contacts=5, Specifications="USB 2.0", Supplier 1=Digi-Key
H4: library part JA_MOLEX_KK_3POS, "CONN HEADER 3POS 2.54mm VERT_Thru Hole", Manufacturer=Molex, Manufacturer PN=22-23-2031, Supplier Part Number 1=9731156, Storage Location="ECE Dept Store", Supplier="ECE Dept", Supplier 1=Farnell
H7 H12 H13: "3Pin Header 2.54mm spacing"
H10: library part JA_MOLEX_KK_4POS, "CONN HEADER 4POS 2.54mm VERT_Thru Hole", Manufacturer=Molex, Manufacturer PN=22-23-2041, Supplier Part Number 1=9731164, Storage Location="ECE Dept Store", Supplier="ECE Dept", Supplier 1=Farnell
H-Bridge_1 H-Bridge_2: "Dual H-Bridge Motor Driver 1.5A"
L1 L3: library part IN_Ferrite-Bead, "Ferrite Bead, Rdc 0.3R, Z100MHZ 600R, Imax 1A, SMD 1206", DC Current Rating=1, DC Resistance Max=0.08, Ferrite Case Style="1206 ^3216 Metric]", Frequency Range="50MHz to 1", Impedance Tolerance="± 25%", Manufacturer=FAIR-RITE, Manufacturer Part Number=2512066017Y1, Supplier Part Number 1=1612060, Ferrite Mounting=SMD, Impedance=600, Manufacturer PN=2512066017Y1, Storage Location="PCB Assembly WS", Supplier="ECE Dept", Supplier 1=Farnell
L2: library part CDRH104RNP-5R2NC, "FIXED IND 5.2UH 6A 22 MOHM SMD", Current - Saturation=5.6A, DC Resistance (DCR)="22 mOhm Max", Frequency - Self Resonant=-, Manufacturer="Sumida America Components Inc.", Operating Temperature="-40°C ~ 100°C", Package / Case=Nonstandard, Supplier Part Number 1=308-2280-1-ND, Tolerance=±30%, Category="Inductors, Coils, Chokes", ComponentLink1Description=http://products.sumida.com/products/pdf/CDRH104R.pdf, ComponentLink1URL=http://products.sumida.com/products/pdf/CDRH104R.pdf, Height - Seated (Max)="0.157\" (4.00mm)", Manufacturer Part Number=CDRH104RNP-5R2NC, Material - Core=Ferrite, Mounting Type="Surface Mount", Packaging="Cut Tape (CT)", Part Status=Active, Pricing 1="1=2.9, 10=2.678, 100=1.8743, 500=1.5173 (NZD)", Q @ Freq=-, Ratings=-, RoHS="RoHS Compliant", Shielding=Shielded, Size / Dimension="0.402\" L x 0.394\" W (10.20mm x 10.00mm)", Stock 1=3849, Supplier 1=Digi-Key, Supplier Device Package=-, Type=-
Q1: library part TM_SSM3J328R, "MOSFET P-CH 20V 6A SOT23-3", Case/Package=SOT-23-3, Continuous Drain Current (ID)=6A, Drain to Source Breakdown Voltage=-20V, Drain to Source Resistance=47.4mR, Drain to Source Voltage (Vdss)=20V, Gate to Source Voltage (Vgs)=8V, Input Capacitance=840pF, Input Capacitance (Ciss) @ Vds="840pF @ 10V", Manufacturer=Toshiba, Max Operating Temperature=150°C, Max Power Dissipation=1W, Min Operating Temperature=-55°C, Package / Case="SOT-23-3 Flat Leads", Package Quantity=3000, Power Dissipation=2W, Supplier Device Package=SOT-23F, Supplier Part Number=SSM3J328RLFDKR-ND, ComponentLink1Description=https://datasheet.ciiva.com/11158/ssm3j328r-datasheet-en-20140301-11158652.pdf, ComponentLink1URL=https://datasheet.ciiva.com/11158/ssm3j328r-datasheet-en-20140301-11158652.pdf, Current - Continuous Drain (Id) @ 25° C=6A, Element Configuration=Single, FET Feature="Logic Level Gate, 1.5V Drive", FET Type="MOSFET P-Channel, Metal Oxide", Gate Charge (Qg) @ Vgs="12.8nC @ 4.5V", Manufacturer Part Number=SSM3J328R,LF, Mount="Surface Mount", Number of Channels=1, Number of Elements=1, Number of Pins=3, Packaging="Tape and Reel", Power - Max=1W, Pricing="1=0.79, 10=0.658, 25=0.5772, 100=0.4939, 250=0.42836, 500=0.36284, 1000=0.27972 (NZD)", Radiation Hardening=No, Rds On Max=29.8mR, Storage Location="PCB Assembly WS", Supplier=Digi-Key, Supplier 1=Digi-Key, Supplier Part Number 1=SSM3J328RLFDKR-ND, Turn-Off Delay Time=107ns, Turn-On Delay Time=32ns, Vgs(th) (Max) @ Id="1V @ 1mA"
R1: library part RS_10R, "RES 10 OHM 1/10W 5% 0603 SMD", Storage Location="PCB Assembly WS", Supplier="ECE Dept"
R2 R3 R15 R16: library part RS_27R, "RES 27 OHM 1/10W 5% 0603 SMD", Storage Location="PCB Assembly WS", Supplier="ECE Dept"
R4 R5 R6: library part RS_100R, "RES 100 OHM 1/10W 5% 0603 SMD", Storage Location="PCB Assembly WS", Supplier="ECE Dept"
R7: library part RS_1K3, "RES 1.3K OHM 1/10W 5% 0603 SMD", Storage Location="PCB Assembly WS", Supplier="ECE Dept"
R8 R9: library part RS_100K, "RES 100K OHM 1/10W 5% 0603 SMD", Storage Location="PCB Assembly WS", Supplier="ECE Dept"
R10 R11 R13 R14: library part RS_0R0, "RES 0.0 OHM 1/10W 5% 0603 SMD", Storage Location="PCB Assembly WS", Supplier="ECE Dept"
R12: library part RT_1R, "RES 1R OHM 1/4W 5% 1206 SMD", Storage Location="PCB Assembly WS", Supplier="ECE Dept"
R17 R20: library part RS_10K, "RES 10.0K OHM 1/10W 5% 0603 SMD", Storage Location="PCB Assembly WS", Supplier="ECE Dept"
R18 R19: library part RS_47R, "RES 47 OHM 1/10W 5% 0603 SMD", Storage Location="PCB Assembly WS", Supplier="ECE Dept"
S1 S2: library part WS_EVQPNF05M, "Panasonic 6 x 3.5mm SMD Light Touch Switch Type SMD", Manufacturer=Panasonic, Supplier Part Number 1=2079481, Manufacturer PN=EVQPNF05M, PackageDescription="6.0 x 3.5 mm", Storage Location="PCB Assembly WS", Supplier="ECE Dept", Supplier 1=Farnell, Supplier 2=Digi-Key, Supplier Part Number 2=P13598SCT-ND
U1: library part SE_ATSAM4S16BA-MU, "IC MCU 32BIT 512KB FLASH 64LQFP", Manufacturer=Atmel, Package / Case=64-LQFP, Supplier Part Number 1=ATSAM4S8BA-ANRCT-ND, Voltage - Supply (Vcc/Vdd)="1.62 V ~ 3.6 V", Code_JEDEC=MO-220VMMD-3, ComponentLink1Description="Manufacturer URL", ComponentLink1URL=http://www.atmel.com/, ComponentLink2Description="SAM4S Series Datasheet", ComponentLink2URL=http://www.atmel.com/dyn/resources/prod_documents/11100.pdf, ComponentLink3Description="SAM4S Series Summary", ComponentLink3URL=http://www.atmel.com/dyn/resources/prod_documents/11100S.pdf, Connectivity="I²C, IrDA, Memory Card, SPI, SSC, UART/USART, USB", Core Processor="ARM® Cortex®-M4", Core Size=32-Bit, Data Converters="A/D 11x12b, D/A 2x12b", Manufacturer Part Number=ATSAM4S8BA-ANR, Number of I/O=47, PackageDescription="64-Pin Quad Flat No-Lead (QFN) Sawn, 9 x 9 x 1.0 mm Body, 0.5 mm Pitch, Exposed Pad", PackageReference=64PS, PackageVersion="revJ, Jul-2007", Packaging="Cut Tape (CT)", Peripherals="Brown-out Detect/Reset, DMA, POR, PWM, WDT", Program Memory Size="512KB (512K x 8)", Program Memory Type=FLASH, RAM Size="128K x 8", Speed=120MHz, Supplier 1=Digi-Key
U2: library part NRF24, "nRF24 SMD Module", Warning="No power planes near or under device"
U3: library part ADP2302ARDZ-5.0-R7, "IC REG BUCK 5V 2A 8SOIC", Current - Output=2A, Frequency - Switching=700kHz, Supplier Part Number 1=ADP2302ARDZ-5.0-R7CT-ND, Voltage - Input (Max)=20V, Voltage - Output (Min/Fixed)=5V, Manufacturer_Part_Number=ADP2302ARDZ-5.0-R7, Output Type=Fixed, Supplier 1=Digi-Key, Type=DEV, Vendor="Analog Devices Inc"
U5 U7: library part SV_CAT6219-330TDGT3, "IC REG LIN 3.3V 500MA TSOT23-5", Base Part Number=CAT6219, Current - Output=500mA, Package / Case="SOT-23-5 Thin, TSOT-23-5", Supplier Device Package=TSOT-23-5, Voltage - Input (Max)=5.5V, Voltage - Output (Min/Fixed)=3.3V, Voltage Dropout (Max)="0.5V @ 500mA", ComponentLink1Description=http://www.onsemi.com/pub/Collateral/CAT6219-D.PDF, ComponentLink1URL=http://www.onsemi.com/pub/Collateral/CAT6219-D.PDF, Manufacturer Part Number=CAT6219-330TDGT3, Supplier=Digi-Key, Supplier 1=Digi-Key
U8: "1.8V - 5V level converter", ComponentLink1Description="Single-Bit Dual-Supply Bus Transceiver with Configurable Voltage-Level Shifting and 3-State Outputs", ComponentLink1URL=http://www.ti.com/lit/ds/symlink/sn74lvc1t45.pdf
Y1: library part XT_CRYSTAL_12MHz_18pF, "CRYSTAL 12MHZ 18PF 6X3.5mm SMD", ESR (Equivalent Series Resistance)="60 Ohm", Frequency Stability=±50ppm, Frequency Tolerance=±30ppm, Load Capacitance=18pF, Manufacturer="CTS-Frequency Controls", Manufacturer Part Number=406C35D12M00000, Operating Mode=Fundamental, Operating Temperature="-20°C ~ 70°C", Package / Case="4-SMD, No Lead (DFN, LCC)", Supplier Part Number 1=CTX855CT-ND, Frequency=12MHz, Height="0.047\" (1.20mm)", Mounting Type="Surface Mount", Size / Dimension="0.236\" L x 0.138\" W (6.00mm x 3.50mm)", Supplier 1=Digi-Key

## Via types
v1: diameter 2.2, hole 1.6, Top Side to Bottom Side, 2 vias
v2: diameter 2, hole 1.5, Top Side to Bottom Side, 1 vias

## Nets (pads, with @x,y where several pads share a name; then routed paths per layer and width w, separated by ;. In a path a pad name is that pad's centre, name@x,y a point inside that pad or via, vN(x,y) a via of type N, cw(c..) or ccw(c..) an arc to the next point about the centre after c; other vN are vias at no path point)
3V3: 3V3_1.1 3V3_2.1 C12.2 C14.2 C16.2 C18.2 C21.2 C22.2 C30.2 DL1.2 DL2.2 H1.7 H1.8 H13.1 U1.1 U1.7 U1.18 U1.45 U1.58 U5.5 U8.1 U8.5
3V3RF: 3V3RF.1 C29.2 H5.1 L1.2 U7.5
"5 V": C20.1 C28.1 U5.1 U5.3 U7.1
5V: 5V.1 C6.2 C7.2 C9.2 C10.2 C31.2 H4.1 H10.1 H12.1 H-Bridge_1.12 L2.2 U3.5 U8.6
D_N: D_N.1 H2.2 R3.1
D_P: D_P.1 H2.3 R2.1
GND: C1.1 C2.1 C3.1 C4.1 C6.1 C7.1 C8.1 C10.1 C11.2 C12.1 C13.2 C14.1 C15.2 C16.1 C17.2 C18.1 C19.2 C20.2 C21.1 C22.1 C24.1 C25.1 C27.2 C28.2 C29.1 C30.1 C31.1 CH1.2 CH2.2 CH3.2 CH4.2 D1.1 GND1.1 GND2.1 GND3.1 GND4.1 H1.5 H1.6 H2.5 H2.6 H4.3 H7.1 H7.3 H10.4 H12.3 H13.3 H-Bridge_1.13 H-Bridge_1.17 H-Bridge_2.13 H-Bridge_2.17 Q1.1 R8.1 R10.2 R11.1 R12.1 R13.2 R14.2 R18.1 R19.1 R20.1 S1.2 S2.2 U1.2 U1.17 U1.46 U1.60 U2.2 U3.7 U3.EPAD U5.2 U7.2 U8.2
  other v1: 43.275,17.8 46.7,33.6
  other v2: 19,25.5
MCU_SLEEP: S2.1 U1.44
NetC1_2: C1.2 R1.1 U2.1
NetC2_2: C2.2 U1.62 Y1.3
NetC3_2: C3.2 U1.61 Y1.1
NetC5_1: C5.1 U3.1
NetC5_2: C5.2 D1.2 L2.1 U3.8
NetC9_1: C9.1 H-Bridge_1.11
NetC11_1: C11.1 H-Bridge_1.14
NetC13_1: C13.1 C15.1 C17.1 C19.1 L3.2 U1.8 U1.12 U1.24 U1.54
NetC23_1: C23.1 R12.2
NetC23_2: C23.2 C24.2 L3.1 U1.64
NetC26_1: C26.1 H-Bridge_2.11
NetC27_1: C27.1 H-Bridge_2.14
NetCH1_1: CH1.1 U1.41
NetCH2_1: CH2.1 U1.38
NetCH3_1: CH3.1 U1.37
NetCH4_1: CH4.1 U1.26
NetDL1_1: DL1.1 R6.1
NetDL2_1: DL2.1 R7.1
NetErase_1: Erase.1 U1.55
NetF1_2: F1.2 Q1.3
NetGPIO_1_1: GPIO_1.1 H12.2 R4.2
NetGPIO_2_1: GPIO_2.1 H13.2 R5.2
NetH4_2: H4.2 LED_OUT.1 U8.4
NetH5_2: H5.2 R8.2 U1.31
NetH10_2: H10.2 U1.11
NetH10_3: H10.3 R17.2
NetH11_1: H11.1 H-Bridge_1.2
NetH11_2: H11.2 H-Bridge_1.4
NetH14_1: H14.1 H-Bridge_1.7
NetH14_2: H14.2 H-Bridge_1.5
NetL1_1: L1.1 R1.2
NetLED_IN_1: LED_IN.1 U1.3 U8.3
NetMOTOR_1_IN_A_1: H-Bridge_1.16 MOTOR_1_IN_A.1 U1.25
NetMOTOR_1_IN_B_1: H-Bridge_1.15 MOTOR_1_IN_B.1 U1.23
NetMOTOR_2_IN_A_1: H-Bridge_1.9 MOTOR_2_IN_A.1 U1.15
NetMOTOR_2_IN_B_1: H-Bridge_1.10 MOTOR_2_IN_B.1 U1.32
NetMOTOR_3_IN_A_1: H-Bridge_2.9 H-Bridge_2.16 MOTOR_3_IN_A.1 U1.13
NetMOTOR_3_IN_B_1: H-Bridge_2.10 H-Bridge_2.15 MOTOR_3_IN_B.1 U1.10
NetR2_2: R2.2 U1.57
NetR3_2: R3.2 U1.56
NetR4_1: R4.1 U1.29
NetR5_1: R5.1 U1.30
NetR9_1: R9.1 U3.4
NetR10_1: H-Bridge_1.3 R10.1
NetR11_2: H-Bridge_1.6 R11.2
NetR13_1: H-Bridge_2.3 R13.1
NetR14_1: H-Bridge_2.6 R14.1
NetR15_1: R15.1 R18.2 U1.6 VBATT_IND.1
NetR16_1: R16.1 R19.2 U1.35 USB_DET.1
NetR17_1: R17.1 R20.2 U1.14
NetU1_5: H-Bridge_2.8 U1.5
NetU1_16: H-Bridge_2.1 U1.16
NetU1_20: H-Bridge_1.8 U1.20
NetU1_34: H-Bridge_1.1 U1.34
NetU1_36: U1.36 U7.3
NetU6_2: H-Bridge_2.2 H-Bridge_2.7
NetU6_4: H-Bridge_2.4 H-Bridge_2.5
nRF_CE: U1.43 U2.3
nRF_CSN: U1.28 U2.4
nRF_IRQ: U1.52 U2.8
nRF_MISO: nRF_MISO.1 U1.27 U2.7
nRF_MOSI: nRF_MOSI.1 U1.22 U2.6
nRF_SCK: nRF_SCK.1 U1.21 U2.5
nRST: H1.1 S1.1 U1.39
STATUS0: R6.2 U1.48
STATUS1: R7.2 U1.47
SWCLK: H1.2 U1.53
SWDIO: H1.4 U1.51
VBATT_IN: F1.1 H7.2 VBATT_IN.1
VBATT_OUT: C4.2 C8.2 C25.2 C26.2 H-Bridge_2.12 Q1.2 R9.2 R15.2 U3.2 U3.3 VBATT_OUT.1
VBUS: H2.1 R16.2
pads on no net: H1.3 H1.9 H1.10 H2.4 U1.4 U1.9 U1.19 U1.33 U1.40 U1.42 U1.49 U1.50 U1.59 U1.63 U3.6 U5.4 U7.4 Y1.2 Y1.4

## Polygon pours and split planes (outlines as drawn)
no net on Ground Plane (split plane): 63.49,0.51 0.51,0.51 0.51,84.49 63.49,84.49
no net on Power Plane (split plane): 10.871,17.431 10.871,11.4 10.871,11.395 10.871,11.39 10.876,11.371 10.88,11.35 10.883,11.346 10.884,11.342 10.897,11.326 10.908,11.308 10.912,11.306 10.915,11.302 15.97,6.942 15.872,1.063 15.454,0.729 0.641,0.641 0.729,15.071 4.7,15.071 4.716,15.074 4.731,15.074 7.131,15.674 7.137,15.677 7.142,15.678 7.159,15.688 7.177,15.696 7.181,15.7 7.186,15.703 7.198,15.719 7.211,15.733 7.213,15.739 7.217,15.744 7.221,15.762 7.228,15.781 7.228,15.787 7.229,15.792 7.327,17.447 8.158,18.371 9.461,18.371
no net on Power Plane (split plane): 63.49,0.51 15.595,0.51 16.081,0.899 16.085,0.904 16.09,0.907 16.101,0.923 16.113,0.938 16.115,0.943 16.119,0.948 16.123,0.967 16.129,0.986 16.128,0.992 16.129,0.998 16.229,6.998 16.228,7.004 16.229,7.01 16.224,7.028 16.22,7.048 16.217,7.053 16.216,7.058 16.204,7.074 16.193,7.09 16.188,7.093 16.185,7.098 11.129,11.459 11.129,17.5 11.127,17.513 11.127,17.525 11.122,17.537 11.12,17.55 11.113,17.56 11.108,17.572 11.099,17.581 11.092,17.592 11.081,17.599 11.072,17.608 9.572,18.608 9.56,18.613 9.55,18.62 9.537,18.622 9.525,18.627 9.512,18.627 9.5,18.629 8.1,18.629 8.097,18.629 8.093,18.629 8.072,18.624 8.05,18.62 8.048,18.618 8.044,18.617 8.027,18.604 8.008,18.592 8.007,18.589 8.004,18.587 7.104,17.587 7.094,17.571 7.083,17.556 7.082,17.549 7.078,17.543 7.075,17.525 7.071,17.508 6.976,15.903 4.684,15.329 0.6,15.329 0.576,15.325 0.551,15.32 0.55,15.32 0.53,15.306 0.51,15.293 0.51,69.29 0.6,69.2 14.9,69.2 22.6,76.9 22.6,84.49 63.49,84.49

## Other copper
Power Plane (plane layer: these items are gaps in the copper):
  pour cut-out: 0.51,84.49 0.521,84.5 22.6,84.5 22.6,76.9 14.9,69.2 0.6,69.2 0.5,69.3 0.51,69.31
  region: 16.4,74.2
  lines w0.254: 0.51,0.51 0.6,15.2 4.7,15.2 7.1,15.8 7.2,17.5 8.1,18.5 9.5,18.5 11,17.5 11,11.4 16.1,7 16,1 15.5,0.6 0.51,0.51

## Silkscreen, mask and mechanical layers (free items; w line width, h text height)
Board Outline:
  the board outline again, w0.254

## Dimensions
0,86 to 64,86 on Mechanical 1
65,85 to 65,0 on Mechanical 1

## Text inside footprints (layer, text, board x,y; h text height)
CH1: Top Overlay "1" at 27.573,37.186 h0.8
CH2: Top Overlay "1" at 27.573,30.286 h0.8
CH3: Top Overlay "1" at 27.573,23.486 h0.8
CH4: Top Overlay "1" at 27.573,16.626 h0.8
H1: Top Overlay "2" at 57.75,52.12 h0.8 r90; Top Overlay "1" at 60.29,52.62 h0.8 r90; Top Overlay "10" at 57.75,65.68 h0.8 r90; Top Overlay "9" at 60.29,65.68 h0.8 r90
H2: Mechanical 1 "PCB Edge" at 41.45,84.57 h0.8 r180
H4: Top Overlay "1" at 9.145,44.595 h0.8 r180
H5: Top Overlay "1" at 9.127,53.814 h0.8 r180
H10: Top Overlay "1" at 25.095,76.155 h0.8 r90
H11: Top Overlay "1" at 54.873,14.786 h0.8
H14: Top Overlay "1" at 54.973,22.526 h0.8
U2: Top Overlay "NO GND/ / POWER / PLANES / UNDER / OR NEARBY" at 2.586,72.175 h0.8
U3: Mechanical 13 "*" at 20.93,24.344 h0.8 r180